# EAGLE board microUSB-FTP (EAGLE 6.3)
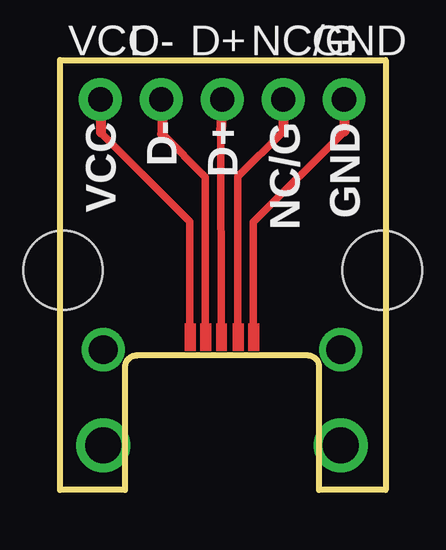
[diagram p0: board, top side]

Size 13.57 x 17.93 mm. Coordinates in mm from the lower left corner, seen from the top.
Outline: 0,0 0,17.93 13.57,17.93 13.57,0 10.8,0 10.8,5.1 arc90 10.35,5.6 3.2,5.6 arc90 2.7,5.1 2.7,0 0,0
Copper layers (1*16): Top 0.035mm / dielectric 1.5mm / Bottom 0.035mm
Design rules "default": minimum track width 8mil, minimum drill 20mil, track to track 8mil, track to pad 8mil, pad to pad 8mil, via to via 8mil, smd to smd 8mil, copper to edge 9mil, drill to drill 8mil, minimum pad ring 12mil, minimum via ring 10mil, stop-mask expansion 4mil, vias tented up to drill 20mil, thermal gap 10mil

## Footprints (pad centres in the part's own frame; a part is rotated, then mirrored left to right if it is on the bottom)
1X01-CLEANBIG = drill 1.016 pad 1.778: 1 0,0
STAND-OFF = hole 3.302: 0,0

## Placement (x,y rotation side)
D+  [1X01-CLEANBIG]  6.76,16.28 0 top
D-  [1X01-CLEANBIG]  4.22,16.28 0 top
GND  [1X01-CLEANBIG]  11.84,16.28 0 top
JP3  STAND-OFF  [STAND-OFF]  13.43,9.16 0 top
JP4  STAND-OFF  [STAND-OFF]  0.13,9.16 0 top
NC/G  [1X01-CLEANBIG]  9.3,16.28 0 top
VCC  [1X01-CLEANBIG]  1.68,16.28 0 top

## Library data of the parts
D+ D- GND NC/G VCC = adafruit
JP3 JP4 = SparkFun

## Nets
D+: D+.1
D-: D-.1
GND: GND.1
S$1: NC/G.1
VBUS: VCC.1

## Tracks (layer width: path | path; a pad name or v marks a point on that pad's centre or on a via)
D+
  Top 0.305: 6.7,14.9 6.71,6.77
  Top 0.406: D+.1 6.7,14.9
D-
  Top 0.305: 4.25,14.85 6.06,13.04 6.06,6.77
  Top 0.406: D-.1 4.25,16.25 4.25,14.85
GND
  Top 0.305: 11.85,14.95 8.06,11.16 8.06,6.82
  Top 0.406: GND.1 11.85,14.95
S$1
  Top 0.305: 9.3,14.95 7.41,13.06 7.41,6.82
  Top 0.406: NC/G.1 9.3,14.95
S$2  (via drill 1.5)
  other vias: 11.7,1.85 1.8,1.85
S$3  (via drill 1.2)
  other vias: 11.7,5.85 1.8,5.85
VBUS
  Top 0.305: 1.7,14.9 5.41,11.19 5.41,6.82
  Top 0.406: VCC.1 1.7,16.26 1.7,14.9
(copper drawn outside any net)
  shapes: Top area x5

## Text on the board
_tsilk: VCC | D- | D+ | NC/G | GND
_bsilk: quilix.com